# EAGLE board Fabulous Kup-Albar-2 (EAGLE 9.7.0)

Size 87.44 x 109.15 mm. Coordinates in mm from the lower left corner, seen from the top.
Outline: 0,0 87.44,0 87.44,109.15 0,109.15 0,0
Copper layers (1*16): Top 0.035mm / dielectric 1.5mm / Bottom 0.035mm
Design rules "default": minimum track width 6mil, minimum drill 0.35mm, track to track 6mil, track to pad 6mil, pad to pad 6mil, via to via 6mil, smd to smd 6mil, copper to edge 40mil, drill to drill 6mil, minimum pad ring 10mil, minimum via ring 8mil, stop-mask expansion 4mil, vias tented up to drill 0mil, thermal gap 10mil

## Footprints (pad centres in the part's own frame; a part is rotated, then mirrored left to right if it is on the bottom)
LEDRD254W60D565H860B = drill 0.981 pad 1.581: 1 -1.27,0; 2 1.27,0
PIEZO = drill 1 pad 1.6: 1 -3.5,0; 2 3.5,0
RESAD1016W63L850D250B = drill 0.83 pad 1.43: 1 -5.08,0; 2 5.08,0
SWITCH-MOMENTARY-PTH-6.5MM = drill 1.016 pad 1.88: 1 -3.251,2.261; 2 3.251,2.261; 3 -3.251,-2.261; 4 3.251,-2.261
ARDUINO-UNO-R3-SHIELD = drill 1.016 pad 1.88: 3.3V 24.13,-2.54; 5V 24.13,0; A0 24.13,12.7; A1 24.13,15.24; A2 24.13,17.78; A3 24.13,20.32; A4 24.13,22.86; A5 24.13,25.4; AREF -24.13,-13.97; D2 -24.13,20.32; D3 -24.13,17.78; D4 -24.13,15.24; D5 -24.13,12.7; D6 -24.13,10.16; D7 -24.13,7.62; D8 -24.13,3.81; D9 -24.13,1.27; D10 -24.13,-1.27; D11 -24.13,-3.81; D12 -24.13,-6.35; D13 -24.13,-8.89; GND@0 24.13,2.54; GND@1 24.13,5.08; GND@2 -24.13,-11.43; IOREF 24.13,-7.62; NC 24.13,-10.16; RES 24.13,-5.08; RX -24.13,25.4; SCL -24.13,-19.05; SDA -24.13,-16.51; TX -24.13,22.86; VIN 24.13,7.62

## Placement (x,y rotation side)
D1  RED  [LEDRD254W60D565H860B]  16.95,11.04 180 top
D2  RED  [LEDRD254W60D565H860B]  29.65,11.04 180 top
D3  RED  [LEDRD254W60D565H860B]  42.35,11.04 180 top
D4  RED  [LEDRD254W60D565H860B]  52.51,11.04 180 top
PIEZO1  PIEZO  [PIEZO]  67.75,13.58 180 top
R1  220  [RESAD1016W63L850D250B]  51.24,26.28 90 top
R2  220  [RESAD1016W63L850D250B]  15.68,26.28 90 top
R3  220  [RESAD1016W63L850D250B]  28.38,26.28 90 top
R4  220  [RESAD1016W63L850D250B]  41.08,26.28 90 top
S1  SWITCH_MOMENTARY  [SWITCH-MOMENTARY-PTH-6.5MM]  79.18,14.85 270 top
U1  ARDUINO-UNO-R3-SHIELD  [ARDUINO-UNO-R3-SHIELD]  34.52,79.3 90 top

## Library data of the parts
D1-D4 = Tinkercad; CATEGORY: Opto-Electronic; SUB-CATEGORY: LED; VALUE: LED_RED
PIEZO1 R1-R4 S1 U1 = Tinkercad

## Nets
D1_C: D1.2 R2.1
D2_C: D2.2 R3.1
D3_C: D3.2 R4.1
D4_C: D4.2 R1.1
U1_D2: S1.1 S1.2 U1.D2
U1_D7: PIEZO1.1 U1.D7
U1_D8: D1.1 U1.D8
U1_D9: D2.1 U1.D9
U1_D10: D3.1 U1.D10
U1_D11: D4.1 U1.D11
U1_GND: PIEZO1.2 R1.2 R2.2 R3.2 R4.2 S1.3 S1.4 U1.GND@0 U1.GND@1 U1.GND@2

## Tracks (layer width: path | path; a pad name or v marks a point on that pad's centre or on a via)
D1_C  (1 unrouted)
D2_C  (1 unrouted)
D3_C  (1 unrouted)
D4_C  (1 unrouted)
U1_D2  (2 unrouted)
U1_D7  (1 unrouted)
U1_D8  (1 unrouted)
U1_D9  (1 unrouted)
U1_D10  (1 unrouted)
U1_D11  (1 unrouted)
U1_GND  (9 unrouted)